# Altium PCB LT3652EDD#PBF.pcbdoc
Units mil, origin at the board's own origin, x right, y up, seen from the top; angles counter-clockwise.
Board outline 1146.93 x 1200.5 mil, 2 copper layers (Top Layer, Bottom Layer); 1 components, 0 nets, 13 pads, 0 vias.
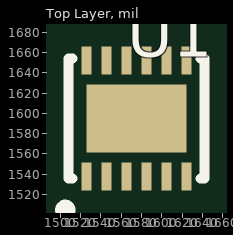
[diagram p0: Top Layer view]
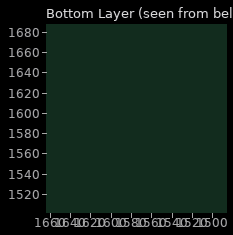
[diagram p1: Bottom Layer view, seen from below]

## Layer stack, top to bottom
Top Layer: signal copper (thickness not stored)
Dielectric: dielectric 12.6, FR-4, Dk 4.8
Bottom Layer: signal copper (thickness not stored)

## Board outline
2146.93,1000 1000,1000 1000,2200.5 2146.93,2200.5

## Components (designator, comment, footprint, x,y, rotation, side; value= is the part's Value field where it differs from the comment)
U1 "DFN-12_L3.0-W3.0-P0.50-LS3.0-BL-EP" DFN-12_L3.0-W3.0-P0.50-LS3.0-BL-EP 1575,1595 r0 top

## Footprints (in the part's own frame and the unit in brackets; to place one, negate y for a bottom-side part, rotate by r counter-clockwise, add the part's x,y. Pads: shape width x height; smd on the part's side, far side on the other; paste and mask are expansions set on the pad)
DFN-12_L3.0-W3.0-P0.50-LS3.0-BL-EP [mil]
  rect 10x27.6 smd paste+0 mask+2: 1(-49.21,-57) 2(-29.53,-57) 3(-9.84,-57) 4(9.84,-57) 5(29.52,-57) 6(49.21,-57) 7(49.21,57) 8(29.52,57) 9(9.84,57) 10(-9.84,57) 11(-29.53,57) 12(-49.21,57)
  rect 98.42x66.9 smd paste+0 mask+2: 13(0,0)
  silkscreen extent -75,-95 67,59

## Nets (pads, with @x,y where several pads share a name; then routed paths per layer and width w, separated by ;. In a path a pad name is that pad's centre, name@x,y a point inside that pad or via, vN(x,y) a via of type N, cw(c..) or ccw(c..) an arc to the next point about the centre after c; other vN are vias at no path point)
pads on no net: U1.1 U1.2 U1.3 U1.4 U1.5 U1.6 U1.7 U1.8 U1.9 U1.10 U1.11 U1.12 U1.13